# Altium PCB LMAT_AMT_MAG.PcbDoc (part 2 of 2)
Units mil, origin at the board's own origin, x right, y up, seen from the top; angles counter-clockwise.
Board outline 1437.01 x 1604.33 mil, 2 copper layers (Top Layer, Bottom Layer), stack 62.192 mil thick; 79 components, 39 nets, 215 pads, 131 vias.
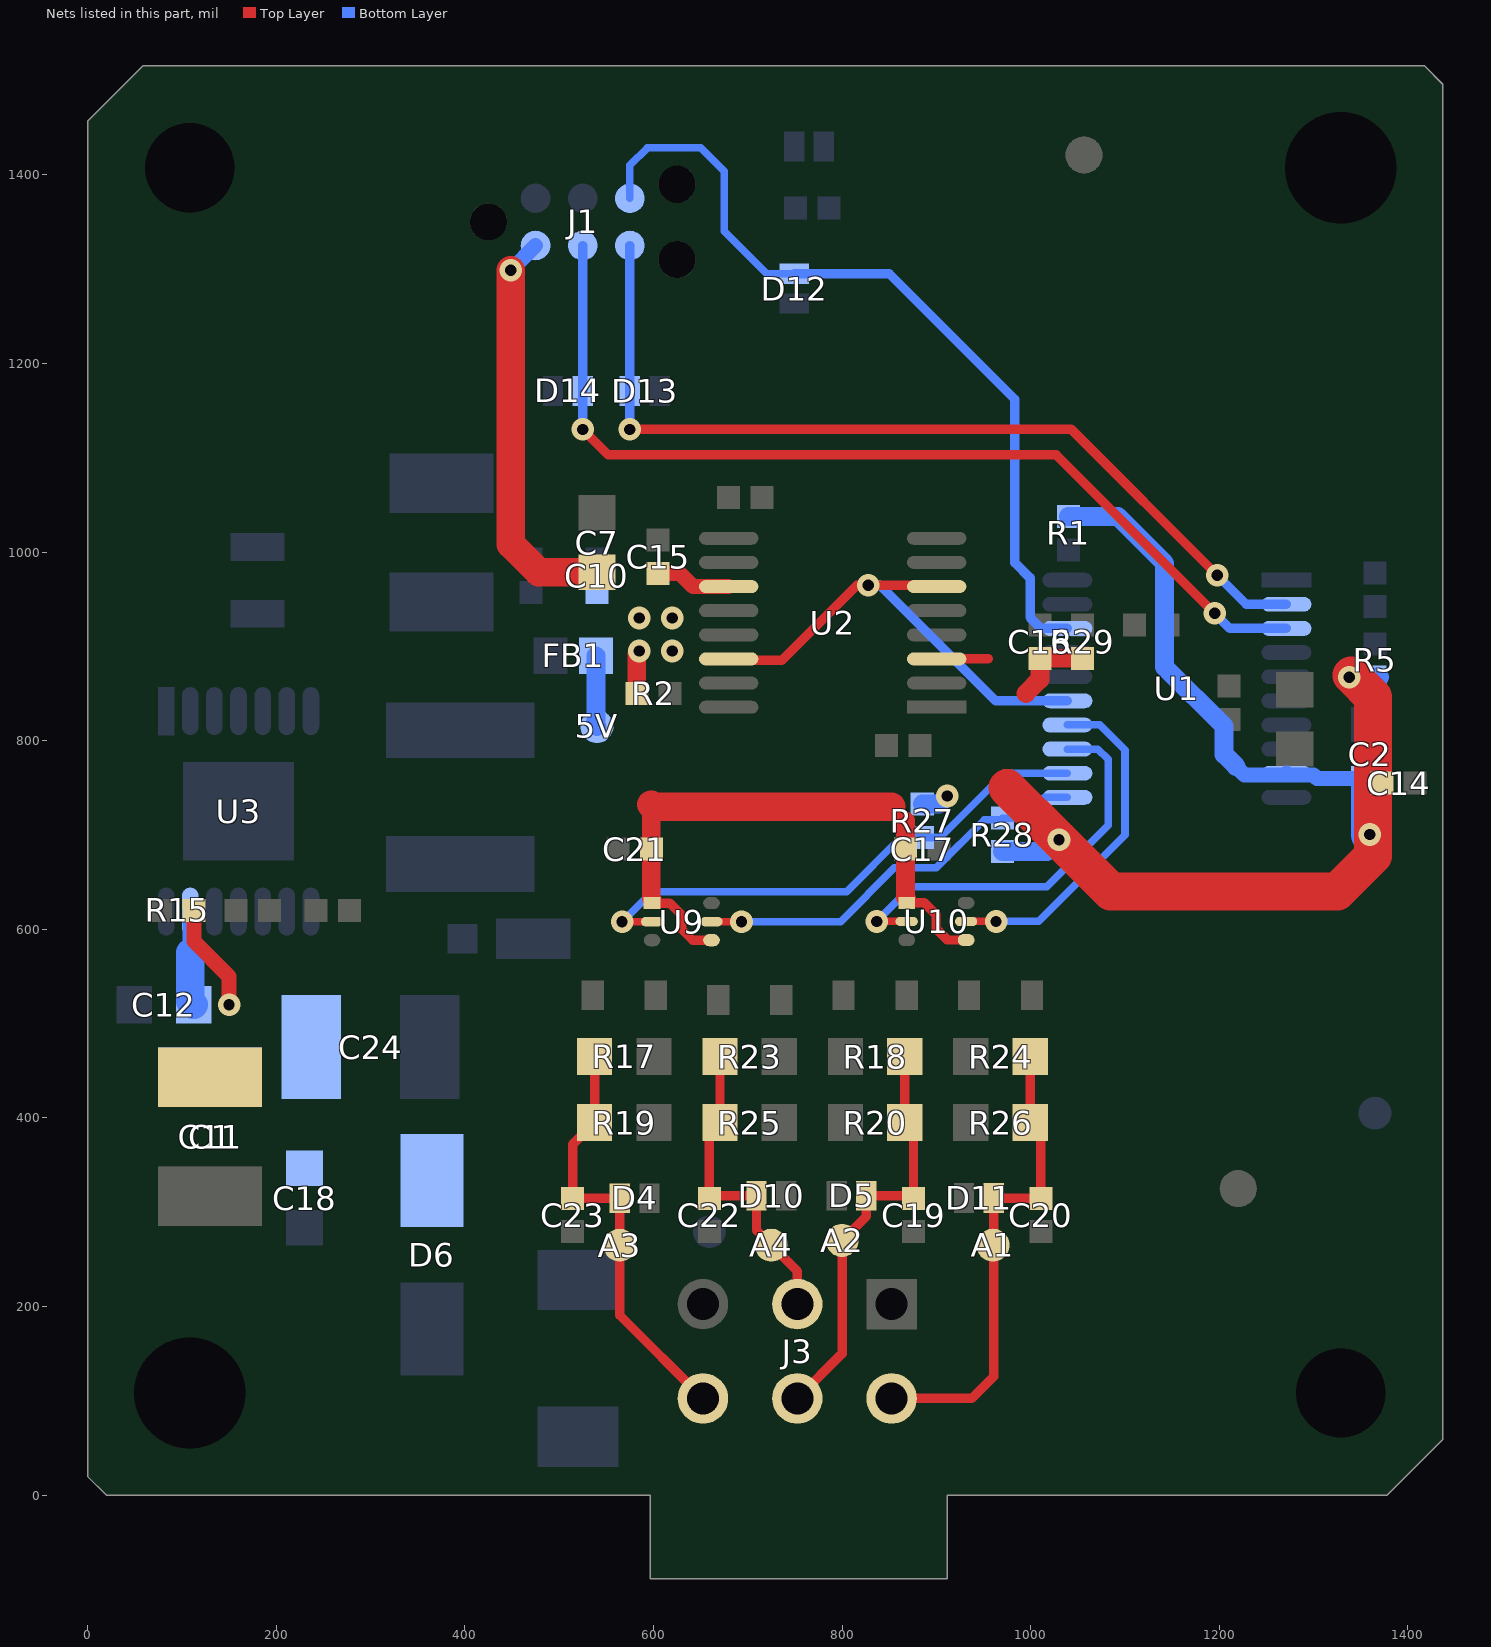
[diagram p2: the nets of this part, all layers, seen from the top]

## Via types
v1: diameter 24, hole 12, Top Layer to Bottom Layer, tented both sides, 125 vias
v2: diameter 19.68, hole 7.87, Top Layer to Bottom Layer, 6 vias

## Nets (pads, with @x,y where several pads share a name; then routed paths per layer and width w, separated by ;. In a path a pad name is that pad's centre, name@x,y a point inside that pad or via, vN(x,y) a via of type N, cw(c..) or ccw(c..) an arc to the next point about the centre after c; other vN are vias at no path point) (continued)
S1: U1.13 U10.2 | length 436.9
  Top Layer w8: v1(836.72,608.28) U10.2@868.5,608.28
  Bottom Layer w8: v1(836.72,608.28) 873.45,645 1016.77,645 1082,710.23 1082,780.17 1071.14,791.02 U1.13@1038.86,791.02
S2: U1.14 U10.5 | length 368.7
  Top Layer w8: U10.5@931.5,608.28 v1(963.28,608.28)
  Bottom Layer w8: v1(963.28,608.28) 1008.28,608.28 1100,700 1100,790 1073.39,816.61 U1.14@1038.86,816.61
S3: R28.1 U1.11 U9.5 | length 433
  Top Layer w8: U9.5@661.5,608.05 v1(693.28,608.05)
  Bottom Layer w8: v1(693.28,608.05) 798.51,608.05 855.46,665 900,665 951,716 970,716 R28.1@970,717.72 992.72,717.72 1014.84,739.84 U1.11@1038.86,739.84
S4: R27.1 U1.12 U9.2 | length 569.1
  Top Layer w8: v1(566.72,608.05) U9.2@598.5,608.05
  Bottom Layer w8: v1(566.72,608.05) 598.67,640 805,640 862.28,697.28 R27.1@885,697.28 904.05,697.28 972.2,765.43 U1.12@1038.86,765.43
SCLK: U1.15 U2.6 U2.14 | length 518.3
  Top Layer w10: U2.14@679.76,886.61 679.76,885.2 736.18,885.2 815.77,964.8 v1(827.57,964.8) 900.24,964.8 U2.6@900.24,963.39
  Bottom Layer w10: v1(827.57,964.8) 840.2,964.8 962.8,842.2 U1.15@1038.86,842.2
SIGNAL1: A1.1 C20.2 D11.2 J3.4 R24.2 R26.1 | length 512.2
  Top Layer w10: J3.4@852.5,102.5 937.5,102.5 960.75,125.75 D11.2@960.75,315 961.03,314.72 C20.2@1010.75,314.72 1010.75,383.74 R26.1@999.49,395 R24.2@999.49,465
SIGNAL2: A2.1 C19.2 D5.2 J3.5 R18.2 R20.1 | length 450.7
  Top Layer w10: J3.5@752.5,102.5 800,150 A2.1@800,270 825.75,295.75 D5.2@825.75,317.57 872.89,317.57 C19.2@875.75,314.72 875.75,385.75 R20.1@866.5,395 R18.2@866.5,465
SIGNAL3: A3.1 C23.2 D4.2 J3.6 R17.2 R19.1 | length 458.9
  Top Layer w10: R17.2@537.52,465 R19.1@537.52,395 514.25,371.73 C23.2@514.25,314.72 514.42,314.88 D4.2@564.25,314.88 A3.1@564.25,265 564.25,190.75 J3.6@652.5,102.5
SIGNAL4: A4.1 C22.2 D10.2 J3.2 R23.2 R25.1 | length 339.1
  Top Layer w10: R23.2@670.51,465 R25.1@670.51,395 659.25,383.74 C22.2@659.25,314.72 662.11,317.57 D10.2@709.25,317.57 709.25,280.75 A4.1@725,265 752.5,237.5 J3.2@752.5,202.5
SWIM: D12.2 J1.5 U1.18 | length 881
  Bottom Layer w8: J1.5@575,1375 575,1410 593.69,1428.69 650,1428.69 675,1403.69 675,1340 720,1295 D12.2@749.25,1295
  Bottom Layer w10: D12.2@749.25,1295 850,1295 983,1162 983,988.82 999.28,972.53 999.28,930.72 1011.02,918.98 U1.18@1038.86,918.98
UART_RX: D14.2 J1.4 U1.3 | length 1028.6
  Top Layer w10: v1(525,1130) 552,1103 1027,1103 v1(1195,935)
  Bottom Layer w10: v1(525,1130) D14.2@525,1170.75 J1.4@525,1325 ; v1(1195,935) 1211.02,918.98 U1.3@1271.14,918.98
UART_TX: D13.2 J1.6 U1.2 | length 968
  Top Layer w10: v1(575,1130) 1043.18,1130 v1(1197.74,975.44)
  Bottom Layer w10: v1(575,1130) D13.2@575,1170.75 J1.6@575,1325 ; v1(1197.74,975.44) 1228.62,944.57 U1.2@1271.14,944.57
VCC_5V: 5V.1 C2.2 C7.2 C10.2 C14.2 C15.2 C16.2 C17.2 C21.2 FB1.2 J1.2 R1.2 R2.2 R5.2 R27.2 R28.2 R29.2 U1.9 U2.3 U2.11 U9.1 U9.4 U10.1 U10.4 | length 2772.7
  Top Layer w10: U9.1@598.5,632.05 U9.1@598.5,627.74 617.26,627.74 630,615 630,600 641.63,588.37 U9.4@661.5,588.37 ; 852.28,730 867.28,715 ; U10.1@868.5,632.28 U10.1@868.5,627.96 887.26,627.96 900,615.22 900,600.22 911.63,588.59 U10.4@931.5,588.59 ; U2.3@900.24,886.61 955,886.61
  Top Layer w16: C15.2@605,977.28 628.18,977.28 642.08,963.39 U2.11@679.76,963.39
  Top Layer w20: C7.2@545,977.51 C7.2@545,978.5 ; R2.2@582.28,850 582.28,892.28 v1(585,895) ; 597.72,732.28 C21.2@597.72,685 597.72,632.84 U9.1@598.5,632.05 ; 867.28,715 C17.2@867.28,685 867.28,633.5 U10.1@868.5,632.28 ; 995,850 1009.84,864.84 C16.2@1009.84,887.28 R29.2@1055,887.28
  Top Layer w30: v1(448.64,1298.64) 448.64,1008.36 478.5,978.5 C7.2@540,978.5 ; 597.72,732.28 600,730 852.28,730
  Top Layer w40: 975,750 v1(1030,695) 1085,640 1325,640 1363.02,678.02 1363.02,846.22 v1@1339.84,869.4
  Bottom Layer w16: v1(448.64,1298.64) J1.2@475,1325 ; 1217.72,772.72 1226.72,763.72 1269.42,763.72 U1.9@1271.14,765.43 1272.86,763.72 1299.73,763.72 1303.45,760 1358.48,760 C2.2@1359.5,761.02
  Bottom Layer w20: FB1.2@539.02,890 539.02,815.98 5V.1@540,815 ; R27.2@885,732.72 902.72,732.72 v1(911.36,741.36) ; R28.2@970,682.28 1017.28,682.28 v1(1030,695) ; R1.2@1040,1037.72 1092.28,1037.72 1142,988 1142,878 1205,815 1205,785.43 1217.72,772.72 ; v1(1337.72,867.28) R5.2@1365,867.28 R5.2@1370,867.28
  Bottom Layer w40: v1(1359.5,700.5) C2.2@1359.5,754.22
  other v1: 620,895 585,930 620,930
VCC_IN: C1.2 C11.2 C12.1 C18.1 C24.2 D6.2 R15.2 U3.13 | length 215.7
  Top Layer w16: R15.2@112.72,620 112.72,587.28 150,550 v1(150,520)
  Bottom Layer w16: 108.82,575 U3.13@108.82,618.7
  Bottom Layer w30: 108.82,575 108.82,523.66 C12.1@112.48,520
pads on no net: FID1.0 FID2.0 FID3.0 FID4.0 J1.0 U1.5 U1.6 U3.1 U3.2 U3.3 U3.6 U3.8 U3.12

## Polygon pours and split planes (outlines as drawn)
GND on Bottom Layer "GND_L02_P107" (solid, remove dead copper, pour order 107): 0,19.68 19.68,0 1377.95,0 1437.01,59.05 1437.01,1496.06 1417.32,1515.75 59.06,1515.75 0,1456.69
VCC_IN on Bottom Layer "VCC_IN_L02_P106" (solid, remove dead copper, pour order 106): 74.99,395 75,475 85,485 90,490 90,543 95,548 262,548 285,525 285,405 290,400 400,400 420,380 420,290 410,280 311.5,280 270,321.5 198.5,321.5 185,335 185,390 180,395
NetD6_1 on Bottom Layer "NETD6_1_L02_P105" (solid, remove dead copper, pour order 105): 705,160 699.87,154.87 474.87,154.87 435,115 345,115 330,130 330,225 350,245 420,245 475,300 615,300 640,325 692.57,325 705,312.57
NetC4_2 on Bottom Layer "NETC4_2_L02_P104" (solid, remove dead copper, pour order 104): 505.01,971.5 445.5,971.5 445.5,989.5 440,995 295,995 280,980 280,775 300,755 490,755 505,770 505,795 505.01,956.01
VCC_5V on Bottom Layer "VCC_5V_L02_P103" (solid, remove dead copper, pour order 103): 525,840 525,973 528.57,976.57 623.43,976.57 640,960 640,845.31 634.69,840
GND on Top Layer "GND_L01_P102" (solid, remove dead copper, pour order 102): 0,19.68 19.68,0 1377.95,0 1437.01,59.05 1437.01,1496.06 1417.32,1515.75 59.06,1515.75 0,1456.69
VCC_5V on Top Layer "VCC_5V_L01_P101" (solid, remove dead copper, pour order 101): 551.46,817.77 551.46,743.54 572.23,722.77 975,722.77 1000,747.77 1000,900 960,900 940,880 940,805 887.77,752.77 616.46,752.77 595,774.23 595,817.77 634.69,817.77 636.52,939.22 582.88,992.77 578,992.77 568,1002.77 505,1002.77 500,997.77 500,922.77 505.52,917.25 551.69,917.25
VCC_IN on Top Layer "VCC_IN_L01_P100" (solid, remove dead copper, pour order 100): 185,535 135,585 135,650 130,655 105,655 100.22,650.22 100.22,520.22 75.01,495.01 74.99,395 174.8,395 245,395 285,435 285,525 275,535

## Keep-outs
Keep-Out Layer:
  lines w5: 0,222.5 cw(c108.21,108.21) 222.5,0 ; 0,1293 ccw(c108.27,1407.48) 222.39,1516.12 ; 1214.27,1515.75 ccw(c1328.52,1407.26) 1437,1293 ; 1215,0 cw(c1328.54,108.72) 1437.01,222.5 ; 59.06,1515.75 59.06,1515.75 ; 59.06,1515.75 0,1456.69 0,19.68 19.68,0 596.46,0 596.46,-88.58 911.42,-88.58 911.42,0 1377.95,0 1437.01,59.05 1437.01,1496.06 1417.32,1515.75 59.06,1515.75
  text "'.Layer_Name'" at 15860,-9491 h150

## Other copper
Top Layer:
  text "'.Layer_Name'" at 15625,-9501 h150
Bottom Layer:
  text "'.Layer_Name'" at 15750,-9501 h150

## Silkscreen, mask and mechanical layers (free items; w line width, h text height)
Top Overlay:
  circle w10: c350,290 r50
  circle w10: c325,1075 r50
  lines w6: 325,1125 325,1150 ; 398,294 459,294 ; 460,239 460,350 1075,350 1075,240 ; 462,239 1075,239 ; 75,1150 75,1280 90,1280 575,1280 575,1150 75,1150
  text "LMAT_MAG_V2" at 621.22,1195.92 h100
  text "A" at 305,1050 h60
  text "A" at 330,265 h60
  text "'.Layer_Name'" at 15755,-9491 h30
Bottom Overlay:
  text "'.Layer_Name'" at 15795,-9476 h30
Top Paste:
  text "'.Layer_Name'" at 15940,-9481 h150
Bottom Paste:
  text "'.Layer_Name'" at 15940,-9501 h150
Top Solder:
  rectangle: 916.77,578.45 946,638.22
  rectangle: 853.74,578.41 882.97,638.19
  text "'.Layer_Name'" at 16030,-9481 h150
Drill Guide:
  text "'.Layer_Name'" at 16070,-9496 h150
Fabrication Notes:
  drawing of 191 lines, arcs and shapes, not listed
  text "Layer" at 4869.5,5696.5 h60
  text "Name" at 5279.41,5696.5 h60
  text "Material" at 6209.16,5696.5 h60
  text "Thickness" at 7068.92,5696.5 h60
  text "Constant" at 7718.76,5696.5 h60
  text "Board Layer Stack" at 8288.62,5696.5 h60
  text "1" at 4869.5,5576.5 h60
  text "Top Overlay" at 5279.41,5576.5 h60
  text "2" at 4869.5,5456.5 h60
  text "Top Solder" at 5279.41,5456.5 h60
  text "Solder Resist" at 6209.16,5456.5 h60
  text "0.40mil" at 7068.92,5456.5 h60
  text "3.5" at 7718.76,5456.5 h60
  text "3" at 4869.5,5336.5 h60
  text "Top Layer" at 5279.41,5336.5 h60
  text "Copper" at 6209.16,5336.5 h60
  text "1.40mil" at 7068.92,5336.5 h60
  text "4" at 4869.5,5216.5 h60
  text "Dielectric 1" at 5279.41,5216.5 h60
  text "FR-4" at 6209.16,5216.5 h60
  text "59.39mil" at 7068.92,5216.5 h60
  text "4.2" at 7718.76,5216.5 h60
  text "5" at 4869.5,5096.5 h60
  text "Bottom Layer" at 5279.41,5096.5 h60
  text "Copper" at 6209.16,5096.5 h60
  text "1.40mil" at 7068.92,5096.5 h60
  text "6" at 4869.5,4976.5 h60
  text "Bottom solder" at 5279.41,4976.5 h60
  text "Solder Resist" at 6209.16,4976.5 h60
  text "0.40mil" at 7068.92,4976.5 h60
  text "3.5" at 7718.76,4976.5 h60
  text "7" at 4869.5,4856.5 h60
  text "Bottom Overlay" at 5279.41,4856.5 h60
  text "Total Pcb Thickness = 1.6MM +/- 10%" at 5255.55,4296.24 h100
  text "Finished cu Thickness: 1 OZ" at 5656.3,4045.3 h100
  text "FABRICATION NOTES:" at -10970.2,697.07 h80
  text "1. LATEST VERSION OF ALL REFERENCED IPC SPECIFICATIONS TO BE USED." at -10970.2,497.07 h70
  text "2. ALL MULTILAYER PC BOARDS MUST BE PRODUCED IN ACCORDANCE IPC-A-600, CLASS 2." at -10970.2,297.14 h70
  text "3. INSPECT ALL MULTILAYER PC BOARDS IN ACCORDANCE WITH IPC-6012, CLASS 2." at -10970.2,97.14 h70
  text "4. MATERIAL:  THIN LAMINATE, FR4 COPPER CLAD 1 OZ PER LAYER (EXTERNAL LAYERS)" at -10970.2,-102.86 h70
  text "1.6 MM +/-10% THICK, COLOR GREEN," at -10772.2,-237.93 h70
  text "MINIMUM CTI (PER IEC 60112 USING SOLUTION A) = 175." at -10772.2,-387.93 h70
  text "5. FABRICATE BOARDS USING THE GERBER FILES CONTAINED IN FABRICATION FOLDER." at -10970.2,-602.86 h70
  text "6. DRILL DATA ARE CONTAINED IN THE FABRICATION FOLDER." at -10970.2,-812.86 h70
  text "7. ALL HOLE DIAMETERS MUST BE PER DRILL CHART +/-0.003 INCHES TOLERANCE," at -10970.2,-1017.86 h70
  text "UNLESS OTHERWISE SPECIFIED." at -10770.2,-1164.93 h70
  text "8. PLATED-THRU HOLES TO HAVE COPPER WALL THICKNESS NOT LESS THAN 0.001 INCHES." at -10970.2,-1367.86 h70
  text "THICKNESS TO BE DETERMINED BY IPC-6012, CLASS 2." at -10790.2,-1512.93 h70
  text "9. SURFACE FINISH PROCESS MUST BE HAL LEAD-FREE" at -10970.2,-1717.86 h70
  text "10. SILKSCREEN BOTH SIDES WITH WHITE EPOXY NON-CONDUCTIVE INK." at -10970.2,-1892.93 h70
  text "SILKSCREEN MAY BE TRIMMED OFF ANY SOLDERED ENTITY." at -10714.2,-2042.93 h70
  text "11. SOLDER MASK BOTH SIDES WITH LIQUID PHOTO IMAGEABLE SOLDER MASK (LPI)," at -10970.2,-2242.93 h70
  text "MEETING IPC-SM-840, CLASS 2, HIGH PERFORMANCE SPECIFICATIONS." at -10720.2,-2380.93 h70
  text "FINISH: SOLDER MASK OVER BARE COPPER (SMOBC)." at -10720.2,-2535.93 h70
  text "12. WARP AND TWIST SHALL BE LESS THAN 0.0075 INCH PER INCH." at -10970.2,-2752.93 h70
  text "INSPECT PER IPC-TM-650, 2.4.22." at -10714.2,-2894.93 h70
  text "13. ALL BOARDS MUST BE DATE CODED USING A FOUR DIGIT CODE," at -10970.2,-3087.93 h70
  text "YEAR FOLLOWED BY WEEK (e.g. 0449 = 49TH WEEK OF 2004)." at -10714.2,-3229.93 h70
  text "14. ALL DIMENSIONS AND HOLE DIAMETERS APPLY TO THE FINISHED BOARD." at -10970.2,-3442.93 h70
  text "15. PADS MUST BE FINISHED TO WITHIN +/-0.0015 INCHES OF THE MINOR DIMENSION (PAD WIDTH)" at -10970.2,-3637.93 h70
  text "AND +/-0.002 INCHES OF THE MAJOR DIMENSION (PAD LENGTH)." at -10711.2,-3789.93 h70
  text "16. FIDUCIALS MUST BE FREE OF ANY MARKINGS." at -10970.2,-3972.93 h70
  text "17. BARE BOARD TO BE ELECTRICALLY TESTED IN ACCORDANCE WITH IPC-ET-652 AND MARKED AS TESTED." at -10970.2,-4177.93 h70
  text "18. BOARDS SHALL BE UL-RECOGNIZED AND UL-MARKED. UL FIRE RETARDANT RATING 94V-0 OR HIGHER." at -10970.2,-4377.93 h70
  text "19. ROHS: ALL MATERIALS MUST BE COMPLIANT WITH THE ROHS DIRECTIVE." at -10970.2,-4577.93 h70
  text "20. EACH PCB MUST BE INDIVIDUALLY BAGGED." at -10995,-4790 h70
  text "'.Layer_Name'" at 15655,-9501 h150
Board Outlines:
  the board outline again, w5
Bottom Component Outlines:
  lines w5: -13895.07,-5183.7 -13595.07,-5183.7 ; -13895.07,-183.7 -13595.07,-183.7 ; -13895.07,4816.3 -13595.07,4816.3 ; -9895.07,-10183.7 -9895.07,-9883.7 ; -9895.07,9516.3 -9895.07,9816.3 ; -5895.07,-10183.7 -5895.07,-9883.7 ; -5895.07,9516.3 -5895.07,9816.3 ; -1895.07,-10183.7 -1895.07,-9883.7 ; -1895.07,9516.3 -1895.07,9816.3 ; 2104.93,-10183.7 2104.93,-9883.7 ; 2104.93,9516.3 2104.93,9816.3 ; 6104.93,-10183.7 6104.93,-9883.7 ; 6104.93,9516.3 6104.93,9816.3 ; 10104.93,-10183.7 10104.93,-9883.7 ; 10104.93,9516.3 10104.93,9816.3 ; 11904.93,-9883.7 13304.93,-9883.7 17804.93,-9883.7 ; 14104.93,-10183.7 14104.93,-9883.7 ; 14104.93,9516.3 14104.93,9816.3 ; 17804.93,-8683.7 17804.93,-9883.7 ; 17804.93,-5183.7 18104.93,-5183.7 ; 17804.93,-183.7 18104.93,-183.7 ; 17804.93,4816.3 18104.93,4816.3 ; 17804.93,-9883.7 -13595.07,-9883.7 -13595.07,9516.3 17804.93,9516.3 17804.93,-9883.7 ; -13895.07,-10183.7 18104.93,-10183.7 18104.93,9816.3 -13895.07,9816.3 -13895.07,-10183.7
  lines w10: 10500.93,-9879.8 11800.93,-9879.8 17800.93,-9879.8 17800.93,-8379.8 ; 10500.93,-8010.15 17795.93,-8010.15 ; 11800.93,-9579.8 14200.93,-9579.8 17800.93,-9579.8 ; 11800.93,-9279.8 14200.93,-9279.8 17795.65,-9279.8 ; 11800.93,-8979.8 14200.93,-8979.8 17800.93,-8979.8 ; 11800.93,-8679.8 14200.93,-8679.8 ; 12800.93,-9879.8 12800.93,-9579.8 ; 13200.93,-9279.8 13200.93,-8379.8 ; 14200.93,-9879.8 14200.93,-8379.8 ; 15100.93,-9879.8 15100.93,-9579.8 ; 15500.93,-9879.8 15500.93,-9579.8 ; 17400.93,-9879.8 17400.93,-9579.8 ; 10500.93,-8379.8 10500.93,-7600.15 17800.93,-7600.15 17800.93,-8379.8 ; 10500.93,-8379.8 10500.93,-9881.7 11800.93,-9881.7 11800.93,-8379.8 ; 10500.93,-8379.8 11800.93,-8379.8 ; 11800.93,-8379.8 17800.93,-8379.8
  text "1" at -11913.07,9626.3 h70
  text "2" at -7918.07,9626.3 h70
  text "3" at -3923.07,9626.3 h70
  text "4" at 77.94,9626.3 h70
  text "5" at 4076.27,9626.3 h70
  text "6" at 8074.61,9626.3 h70
  text "7" at 12076.27,9626.3 h70
  text "8" at 16071.27,9626.3 h70
  text "A" at -13770.07,7228.3 h70
  text "A" at 17929.93,7228.3 h70
  text "B" at -13770.07,2228.3 h70
  text "B" at 17929.93,2228.3 h70
  text "C" at -13770.07,-2771.7 h70
  text "C" at 17929.93,-2771.7 h70
  text "D" at -13770.07,-7771.7 h70
  text "D" at 17929.93,-7771.7 h70
  text "THE INFORMATION CONTAINED IN THIS DOCUMENT IS PROPRIETARY OF CUSTOMER." at 17641.19,-7784.52 h75
  text "ANY PRODUCTION IN PART OR WHOLE WITHOUT PRIOR WRITTEN AUTHORIZATION OF CUSTOMER IS PROHIBITED." at 17649.33,-7938.02 h75
  text "CUSTOMER:  LUMAX" at 16081.33,-8251.02 h100
  text "DATE" at 14105.93,-8484.8 h45
  text "Drawn By: Harshavardhan K" at 13115.93,-8489.8 h45
  text "UNLESS OTHERWISE" at 11756.33,-8561.02 h70
  text "Design Partner:" at 17615.93,-8610.8 h100
  text "'.Print_Date'" at 14120.93,-8634.8 h70
  text "SPECIFIED:" at 11730.93,-8669.8 h70
  text "DATE" at 14110.93,-8784.8 h45
  text "ALL DIMENSIONS ARE" at 11766.33,-8796.02 h70
  text "Designed By : Vijendra N" at 13113.93,-8799.8 h45
  text "EmbDes Technologies Pvt. Ltd." at 17615.93,-8829.52 h100
  text "'.Print_Date'" at 14120.93,-8934.8 h70
  text "IN INCHES" at 11708.93,-8937.8 h70
  text "DATE" at 14120.93,-9074.8 h45
  text "Checked By : Pandiyan" at 13113.93,-9079.8 h45
  text "TOLERANCES" at 11658.93,-9087.8 h70
  text "PROJECT NAME:     LMAT_AMT_MAG_V1" at 17615.93,-9177.02 h80
  text "(DECIMAL):" at 11708.93,-9187.8 h70
  text "'.Print_Date'" at 14120.93,-9224.8 h70
  text ".X +/-0.1" at 11708.93,-9337.8 h70
  text "REF ID" at 14123.93,-9396.02 h45
  text ".XX +/-0.01" at 11701.33,-9446.02 h70
  text "'.Layer_Name'" at 15045,-9476 h150
  text "LAYER NAME:" at 17615.93,-9486.02 h80
  text "ASSY BOTTOM" at 16642.99,-9524.07 h150
  text ".XXX +/-0.005" at 11696.33,-9556.02 h70
  text "Scale" at 12711.33,-9681.02 h45
  text "Size" at 15385.93,-9684.8 h45
  text "REV" at 17685.93,-9684.8 h45
  text "ANGLES +/-0.5" at 11558.93,-9687.8 h70
  text "Sheet     of" at 14955.93,-9689.8 h45
  text "DWG NO" at 17336.33,-9691.02 h45
  text "DO NOT SCALE" at 14036.33,-9716.02 h70
  text "1:1" at 12385.93,-9784.8 h70
  text "1" at 14497.93,-9799.8 h70
  text "1" at 14891.33,-9801.02 h70
  text "D" at 15309.93,-9808.7 h90
  text "1.0" at 17690.93,-9809.8 h70
  text "DRAWING" at 14036.33,-9841.02 h70
  text "1" at -11913.07,-10068.7 h70
  text "2" at -7918.07,-10068.7 h70
  text "3" at -3923.07,-10068.7 h70
  text "4" at 77.94,-10068.7 h70
  text "5" at 4076.27,-10068.7 h70
  text "6" at 8074.61,-10068.7 h70
  text "7" at 12076.27,-10068.7 h70
  text "8" at 16071.27,-10068.7 h70
Dimensions:
  lines w5: 59.06,1515.75 1417.32,1515.75 1437.01,1496.06 1437.01,59.05 1377.95,0 911.42,0 911.42,-88.58 596.46,-88.58 596.46,0 19.68,0 0,19.68 0,1456.69 59.06,1515.75 ; 59.06,1515.75 59.06,1515.75
  lines w8: 0,-50 0,7.18
  text "'.Layer_Name'" at 15695,-9486 h150
Assembly Notes:
  text "ASSEMBLY NOTES:" at -11451.14,5359.58 h80
  text "CAUTION :" at -11457.14,5212.99 h80
  text "COMPONENTS ARE SUBJECT TO DAMAGE BY STATIC ELECTRICITY." at -10855.14,5204.99 h80
  text "1. SERIALIZATION PER #900-984." at -10871.14,5053.99 h80
  text "2.  REFER BOM FOR COMPONENT PLACEMENT." at -10889.14,4868.99 h80
  text "3. MARK WITH SERIAL NUMBER ON A STICKER PASTED." at -10892.14,4679.99 h80
  text "4.  LABELS SHALL NOT TO BE PLACED OVER EXPOSED COPPER." at -10886.14,4493.33 h80
  text "5. MANUFACTURE PER TS 16469 STANDARD." at -10881.14,4326.99 h80
  text "6. BOARD MUST BE CLEANED EVEN IF USING NO CLEAN FLUX." at -10881.14,4161.99 h80
  text "7.  ASSEMBLY SHALL BE ELECTRICALLY TESTED." at -10876.14,3996.99 h80
  text "8.  SOLDER AND ASSEMBLE AS PER INDUSTRY WORKMANSHIP STANDARDS." at -10876.14,3826.99 h80
  text "9. ASSEMBLY MUST BE ROHS COMPLIANT." at -10886.14,3661.99 h80
Bottom Assembly:
  text "'.Layer_Name'" at 15655,-9486 h30
Top Component Outlines:
  lines w5: -13860.39,-5193.39 -13560.39,-5193.39 ; -13860.39,-193.39 -13560.39,-193.39 ; -13860.39,4806.61 -13560.39,4806.61 ; -9860.39,-10193.39 -9860.39,-9893.39 ; -9860.39,9506.61 -9860.39,9806.61 ; -5860.39,-10193.39 -5860.39,-9893.39 ; -5860.39,9506.61 -5860.39,9806.61 ; -1860.39,-10193.39 -1860.39,-9893.39 ; -1860.39,9506.61 -1860.39,9806.61 ; 2139.61,-10193.39 2139.61,-9893.39 ; 2139.61,9506.61 2139.61,9806.61 ; 6139.61,-10193.39 6139.61,-9893.39 ; 6139.61,9506.61 6139.61,9806.61 ; 10139.61,-10193.39 10139.61,-9893.39 ; 10139.61,9506.61 10139.61,9806.61 ; 11939.61,-9893.39 13339.61,-9893.39 17839.61,-9893.39 ; 14139.61,-10193.39 14139.61,-9893.39 ; 14139.61,9506.61 14139.61,9806.61 ; 17839.61,-8693.39 17839.61,-9893.39 ; 17839.61,-5193.39 18139.61,-5193.39 ; 17839.61,-193.39 18139.61,-193.39 ; 17839.61,4806.61 18139.61,4806.61 ; 17839.61,-9893.39 -13560.39,-9893.39 -13560.39,9506.61 17839.61,9506.61 17839.61,-9893.39 ; -13860.39,-10193.39 18139.61,-10193.39 18139.61,9806.61 -13860.39,9806.61 -13860.39,-10193.39
  lines w10: 10534.51,-9891.39 11834.51,-9891.39 ; 10534.51,-8021.73 17829.51,-8021.73 ; 11829.51,-9891.39 10534.91,-9891.39 10534.51,-9890.98 10534.51,-8391.39 ; 11834.51,-9591.39 14234.51,-9591.39 17834.51,-9591.39 ; 11834.51,-9291.39 14234.51,-9291.39 17829.23,-9291.39 ; 11834.51,-8991.39 14234.51,-8991.39 17834.51,-8991.39 ; 11834.51,-8691.39 14234.51,-8691.39 ; 12834.51,-9891.39 12834.51,-9591.39 ; 13234.51,-9291.39 13234.51,-8391.39 ; 14234.51,-9891.39 14234.51,-8391.39 ; 15134.51,-9891.39 15134.51,-9591.39 ; 15534.51,-9891.39 15534.51,-9591.39 ; 17434.51,-9891.39 17434.51,-9591.39 ; 10534.51,-8391.39 10534.51,-7611.73 17834.51,-7611.73 17834.51,-8391.39 ; 10534.51,-8391.39 11834.51,-8391.39 ; 11834.51,-9891.39 17834.51,-9891.39 17834.51,-8391.39 ; 11834.51,-9891.39 11834.51,-8391.39 ; 11834.51,-8391.39 17834.51,-8391.39
  text "1" at -11878.39,9616.61 h70
  text "2" at -7883.39,9616.61 h70
  text "3" at -3888.39,9616.61 h70
  text "4" at 112.62,9616.61 h70
  text "5" at 4110.96,9616.61 h70
  text "6" at 8109.29,9616.61 h70
  text "7" at 12110.96,9616.61 h70
  text "8" at 16105.96,9616.61 h70
  text "A" at -13735.39,7218.61 h70
  text "A" at 17964.61,7218.61 h70
  text "B" at -13735.39,2218.61 h70
  text "B" at 17964.61,2218.61 h70
  text "C" at -13735.39,-2781.39 h70
  text "C" at 17964.61,-2781.39 h70
  text "THE INFORMATION CONTAINED IN THIS DOCUMENT IS PROPRIETARY OF CUSTOMER." at 10579.77,-7776.1 h75
  text "D" at -13735.39,-7781.39 h70
  text "D" at 17964.61,-7781.39 h70
  text "ANY PRODUCTION IN PART OR WHOLE WITHOUT PRIOR WRITTEN AUTHORIZATION OF CUSTOMER IS PROHIBITED." at 10587.91,-7929.6 h75
  text "CUSTOMER:  LUMAX" at 12426.77,-8241.1 h100
  text "Drawn By : Harshavardhan K" at 11934.51,-8491.39 h45
  text "DATE" at 13334.51,-8491.39 h45
  text "UNLESS OTHERWISE" at 10634.51,-8591.39 h70
  text "Design Partner:" at 14324.51,-8596.1 h100
  text "'.Print_Date'" at 13334.51,-8641.39 h70
  text "SPECIFIED:" at 10884.51,-8691.39 h70
  text "Designed By : Vijendra N" at 11916.51,-8791.39 h45
  text "DATE" at 13334.51,-8791.39 h45
  text "EmbDes Technologies Pvt. Ltd." at 14324.51,-8813.39 h100
  text "ALL DIMENSIONS ARE" at 10584.51,-8841.39 h70
  text "'.Print_Date'" at 13334.51,-8941.39 h70
  text "IN INCHES" at 10862.51,-8959.39 h70
  text "Checked By : Pandiyan" at 11916.51,-9091.39 h45
  text "DATE" at 13334.51,-9091.39 h45
  text "TOLERANCES" at 10812.51,-9109.39 h70
  text "PROJECT NAME:    LMAT_AMT_MAG_V1" at 14324.51,-9188.6 h80
  text "(DECIMAL):" at 10862.51,-9209.39 h70
  text "'.Print_Date'" at 13334.51,-9241.39 h70
  text ".X +/-0.1" at 10862.51,-9359.39 h70
  text "REF ID" at 11934.51,-9391.39 h45
  text ".XX +/-0.01" at 10812.51,-9459.39 h70
  text "LAYER NAME:" at 14324.51,-9478.6 h80
  text "ASSY TOP" at 15519.91,-9544.18 h150
  text ".XXX +/-0.005" at 10712.51,-9559.39 h70
  text "Scale" at 11934.51,-9691.39 h45
  text "Sheet     of" at 14334.51,-9691.39 h45
  text "Size" at 15234.51,-9691.39 h45
  text "DWG NO" at 15634.51,-9691.39 h45
  text "REV" at 17534.51,-9691.39 h45
  text "ANGLES +/-0.5" at 10712.51,-9709.39 h70
  text "DO NOT SCALE" at 13084.51,-9741.39 h70
  text "1:1" at 12234.51,-9791.39 h70
  text "1" at 14434.51,-9811.39 h70
  text "1" at 14934.51,-9816.39 h70
  text "D" at 15284.51,-9816.39 h90
  text "1.0" at 17539.51,-9816.39 h70
  text "DRAWING" at 13234.51,-9841.39 h70
  text "1" at -11878.39,-10078.39 h70
  text "2" at -7883.39,-10078.39 h70
  text "3" at -3888.39,-10078.39 h70
  text "4" at 112.62,-10078.39 h70
  text "5" at 4110.96,-10078.39 h70
  text "6" at 8109.29,-10078.39 h70
  text "7" at 12110.96,-10078.39 h70
  text "8" at 16105.96,-10078.39 h70
Drill Drawing:
  circle w10: c-5384.38,5110.83 r33.33
  lines w10: -5417.71,5244.17 -5401.04,5244.17 -5401.04,5227.5 -5367.71,5227.5 -5367.71,5244.17 -5351.04,5244.17 -5351.04,5277.5 -5367.71,5277.5 -5367.71,5294.17 -5401.04,5294.17 -5401.04,5277.5 -5417.71,5277.5 -5417.71,5244.17 ; -5417.71,5394.17 -5401.04,5394.17 -5384.38,5377.5 -5367.71,5394.17 -5351.04,5394.17 -5367.71,5410.83 -5351.04,5427.5 -5367.71,5427.5 -5384.38,5444.17 -5401.04,5427.5 -5417.71,5427.5 -5401.04,5410.83 -5417.71,5394.17 ; -5417.71,5527.5 -5417.71,5544.17 -5401.04,5560.83 -5417.71,5577.5 -5417.71,5594.17 -5401.04,5594.17 -5384.38,5577.5 -5367.71,5594.17 -5351.04,5594.17 -5351.04,5577.5 -5367.71,5560.83 -5351.04,5544.17 -5351.04,5527.5 -5367.71,5527.5 -5384.38,5544.17 -5401.04,5527.5 -5417.71,5527.5 ; -5417.71,5744.17 -5351.04,5744.17 -5384.38,5677.5 -5417.71,5744.17 ; -5417.71,5827.5 -5351.04,5827.5 -5351.04,5894.17 -5417.71,5894.17 -5417.71,5827.5
  lines w15: -5477.5,5032.5 1642.56,5032.5 ; -5477.5,5932.5 1642.56,5932.5 ; -4926.62,4882.5 -4926.62,6082.5 ; -4336.78,4882.5 -4336.78,6082.5 ; -3217.11,4882.5 -3217.11,6082.5 ; -2711.23,4882.5 -2711.23,6082.5 ; -1977.43,4882.5 -1977.43,6082.5 ; -477.88,4882.5 -477.88,6082.5 ; 111.97,4882.5 111.97,6082.5 ; 857.77,4882.5 857.77,6082.5 ; -5477.5,4882.5 1642.56,4882.5 1642.56,6082.5 -5477.5,6082.5 -5477.5,4882.5
  text "Symbol" at -5387.5,5977.5 h72
  text "Count" at -4881.62,5977.5 h72
  text "Hole Size" at -4291.78,5977.5 h72
  text "Plated" at -3172.11,5977.5 h72
  text "Hole Type" at -2666.23,5977.5 h72
  text "Drill Layer Pair" at -1932.43,5977.5 h72
  text "Via/Pad" at -432.88,5977.5 h72
  text "Pad Shape" at 156.97,5977.5 h72
  text "Template" at 902.77,5977.5 h72
  text "2" at -4881.62,5827.5 h60
  text "2.400mm (94.49mil)" at -4291.78,5827.5 h60
  text "NPTH" at -3172.11,5827.5 h60
  text "Round" at -2666.23,5827.5 h60
  text "Top Layer - Bottom Layer" at -1932.43,5827.5 h60
  text "Pad" at -432.88,5827.5 h60
  text "Rounded" at 156.97,5827.5 h60
  text "c10hn240" at 902.77,5827.5 h60
  text "2" at -4881.62,5677.5 h60
  text "3.000mm (118.11mil)" at -4291.78,5677.5 h60
  text "NPTH" at -3172.11,5677.5 h60
  text "Round" at -2666.23,5677.5 h60
  text "Top Layer - Bottom Layer" at -1932.43,5677.5 h60
  text "Pad" at -432.88,5677.5 h60
  text "Rounded" at 156.97,5677.5 h60
  text "c10hn300" at 902.77,5677.5 h60
  text "3" at -4881.62,5527.5 h60
  text "1.000mm (39.37mil)" at -4291.78,5527.5 h60
  text "NPTH" at -3172.11,5527.5 h60
  text "Round" at -2666.23,5527.5 h60
  text "Top Layer - Bottom Layer" at -1932.43,5527.5 h60
  text "Pad" at -432.88,5527.5 h60
  text "Rounded" at 156.97,5527.5 h60
  text "c100hn100" at 902.77,5527.5 h60
  text "6" at -4881.62,5377.5 h60
  text "0.200mm (7.87mil)" at -4291.78,5377.5 h60
  text "PTH" at -3172.11,5377.5 h60
  text "Round" at -2666.23,5377.5 h60
  text "Top Layer - Bottom Layer" at -1932.43,5377.5 h60
  text "Via" at -432.88,5377.5 h60
  text "Rounded" at 156.97,5377.5 h60
  text "v50h20" at 902.77,5377.5 h60
  text "6" at -4881.62,5227.5 h60
  text "0.860mm (33.86mil)" at -4291.78,5227.5 h60
  text "PTH" at -3172.11,5227.5 h60
  text "Round" at -2666.23,5227.5 h60
  text "Top Layer - Bottom Layer" at -1932.43,5227.5 h60
  text "Pad" at -432.88,5227.5 h60
  text "(Mixed)" at 156.97,5227.5 h60
  text "(Mixed)" at 902.77,5227.5 h60
  text "125" at -4881.62,5077.5 h60
  text "0.305mm (12.00mil)" at -4291.78,5077.5 h60
  text "PTH" at -3172.11,5077.5 h60
  text "Round" at -2666.23,5077.5 h60
  text "Top Layer - Bottom Layer" at -1932.43,5077.5 h60
  text "Via" at -432.88,5077.5 h60
  text "Rounded" at 156.97,5077.5 h60
  text "v61h30m0mx0" at 902.77,5077.5 h60
  text "144 Total" at -4881.62,4927.5 h60
  text "'.Layer_Name'" at 16000,-9491 h150
DXF TOP:
  drawing of 18003 lines, arcs and shapes, not listed

## Dimensions
911.42,-88.58 to 1437.01,1515.75 on Dimensions
0,19.68 to 1437.01,59.05 on Dimensions

## Text inside footprints (layer, text, board x,y; h text height)
D1: Bottom Overlay "K" at 365,579 h30
D2: Top Overlay "K" at 626.53,514.24 h30
D3: Top Overlay "K" at 890,520 h30
D6: Bottom Overlay "K" at 424,370 h30 r270; Bottom Component Outlines "K" at 361,322 h27.56 r270
D8: Top Overlay "K" at 760,510 h30
D9: Top Overlay "K" at 995,555 h30
J3: Top Component Outlines "PCB EDGE" at 867.5,-107.5 h30 r180